# Altium PCB LCboardPCB.PcbDoc (part 2 of 2)
Units mil, origin at the board's own origin, x right, y up, seen from the top; angles counter-clockwise.
Board outline 1635 x 3515 mil, 6 copper layers (Top Layer, Mid-Layer 1, Internal Plane 1, Internal Plane 2, Mid-Layer 2, Bottom Layer); 117 components, 210 nets, 605 pads, 96 vias.
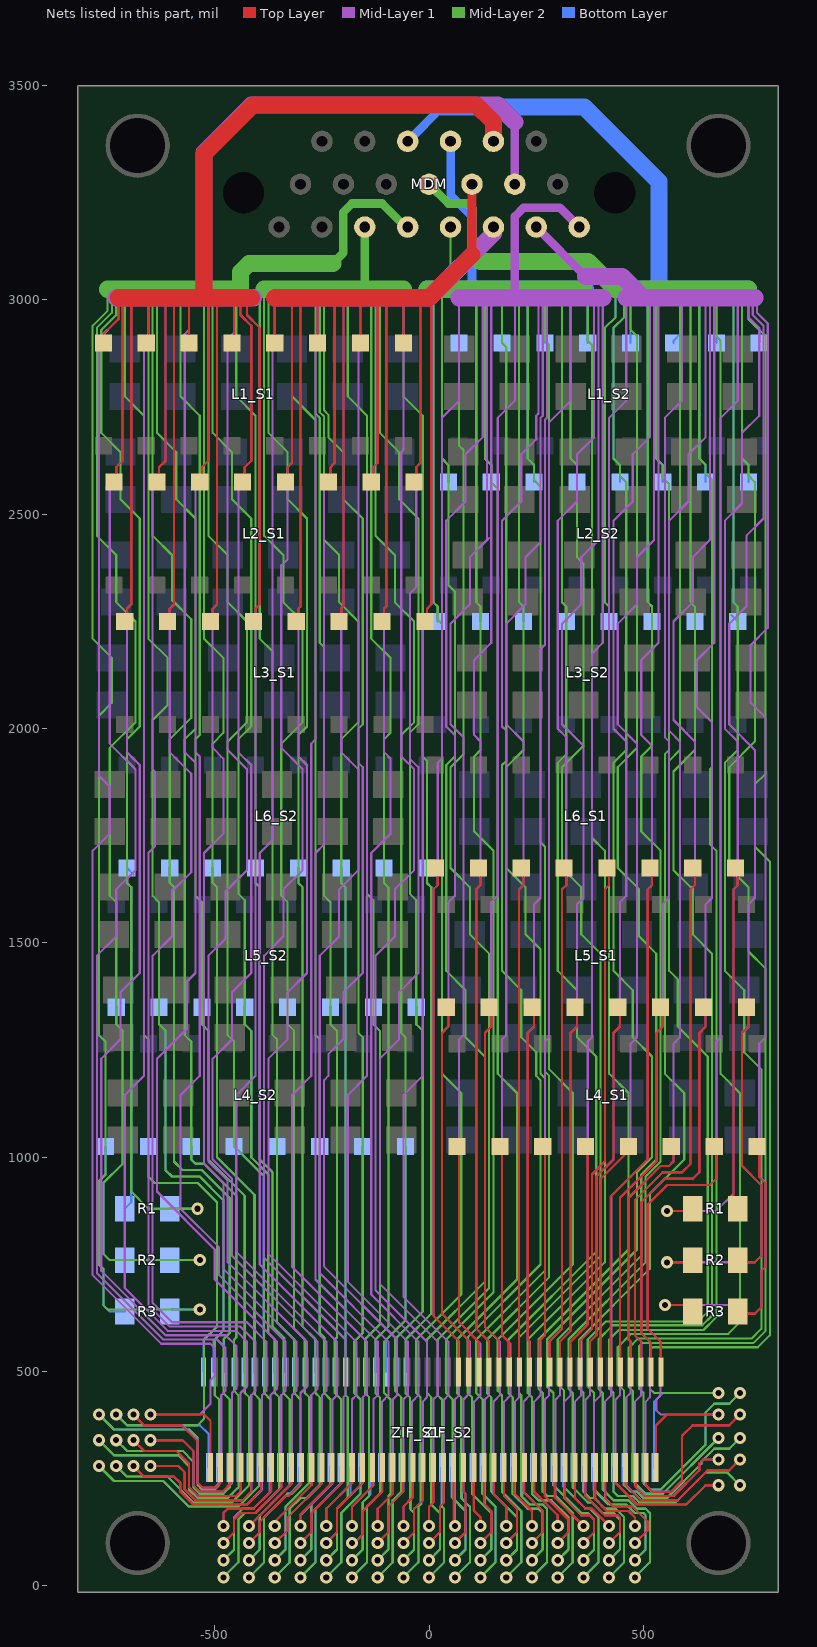
[diagram p6: the nets of this part, all layers, seen from the top]

## Via types
v1: diameter 28.35, hole 14.17, Top Layer to Bottom Layer, 96 vias

## Nets (pads, with @x,y where several pads share a name; then routed paths per layer and width w, separated by ;. In a path a pad name is that pad's centre, name@x,y a point inside that pad or via, vN(x,y) a via of type N, cw(c..) or ccw(c..) an arc to the next point about the centre after c; other vN are vias at no path point) (continued)
NetJ1_3: L1_S1.5 L1_S1.6 L1_S1.7 L1_S1.8 L2_S1.5 L2_S1.6 L2_S1.7 L2_S1.8 L3_S1.5 L3_S1.6 L3_S1.7 L3_S1.8 MDM.3 | length 6701.8
  Top Layer w5: L1_S1.8@-760,2900 -760,2920 -725,2955 -725,3005 -715,2995 -715,2625 -730,2610 L2_S1.8@-730,2570 ; L3_S1.8@-705,2245 -705,2280 -695,2290 -695,3005 ; L1_S1.7@-655,2895 -655,3005 ; L2_S1.7@-630,2570 -630,2610 -615,2625 -615,3005 ; L3_S1.7@-605,2245 -605,2280 -595,2290 -595,3000 ; L1_S1.6@-560,2900 -560,3005 ; L2_S1.6@-530,2570 -530,2610 -515,2625 -515,2995 ; L3_S1.6@-505,2245 -505,2280 -495,2290 -495,3005 ; L1_S1.5@-455,2895 -455,3005 ; -440,2990 -440,2965 -415,2940 -415,2625 -430,2610 L2_S1.5@-430,2570 ; -415,3005 -425,2995 -425,2965 -395,2935 -395,2290 -405,2280 L3_S1.5@-405,2245 ; -340,3450 -340,3455
  Top Layer w40: -725,3005 -695,3005 -655,3005 -615,3005 -560,3005 -525,3005 ; -415,3005 -455,3005 -495,3005 -525,3005 ; MDM.3@150,3370 150,3415 110,3455 -340,3455 -411,3455 -525,3341 -525,3005
NetJ1_4: L1_S1.1 L1_S1.2 L1_S1.3 L1_S1.4 L2_S1.1 L2_S1.2 L2_S1.3 L2_S1.4 L3_S1.1 L3_S1.2 L3_S1.3 L3_S1.4 MDM.4 | length 5895.4
  Top Layer w5: L1_S1.4@-360,2900 -360,3005 ; L2_S1.4@-330,2570 -330,2610 -320,2620 -320,3005 ; L3_S1.4@-305,2245 -305,2280 -300,2285 -300,3005 ; L1_S1.3@-260,2900 -260,3005 ; L2_S1.3@-230,2570 -230,2610 -220,2620 -220,3005 ; L3_S1.3@-205,2245 -205,2280 -200,2285 -200,3005 ; L1_S1.2@-160,2900 -160,3005 ; L2_S1.2@-130,2570 -130,2610 -120,2620 -120,3005 ; L3_S1.2@-105,2245 -105,2280 -100,2285 -100,3005 ; L1_S1.1@-60,2900 -60,3005 ; L2_S1.1@-30,2570 -30,2610 -20,2620 -20,3005 ; L3_S1.1@-5,2245 -5,2280 5,2290 5,3000 0,3005
  Top Layer w20: 100,3105 MDM.4@100,3270
  Top Layer w40: -360,3005 -320,3005 -300,3005 -260,3005 -220,3005 -200,3005 -160,3005 -120,3005 -100,3005 -60,3005 -20,3005 0,3005 100,3105
NetJ1_5: L1_S2.1 L1_S2.2 L1_S2.3 L1_S2.4 L2_S2.1 L2_S2.2 L2_S2.3 L2_S2.4 L3_S2.1 L3_S2.2 L3_S2.3 L3_S2.4 MDM.5 | length 6209.1
  Bottom Layer w5: -5,3025 10,3010 10,2295 20,2285 L3_S2.1@20,2250 ; 30,3025 30,2630 45,2615 L2_S2.1@45,2575 ; MDM.5@40,3370 MDM.5@50,3370 ; L1_S2.1@70,2900 70,3025 ; 100,3025 110,3015 110,2295 120,2285 L3_S2.2@120,2250 ; 130,3025 130,2630 145,2615 L2_S2.2@145,2575 ; L1_S2.2@170,2900 170,3025 ; L3_S2.3@220,2250 220,2285 210,2295 210,3025 230,3005 230,2630 245,2615 L2_S2.3@245,2575 ; L1_S2.3@270,2900 270,3025 ; L3_S2.4@320,2250 320,2285 310,2295 310,3025 330,3005 330,2630 345,2615 L2_S2.4@345,2575 ; L1_S2.4@370,2900 370,3020
  Bottom Layer w20: MDM.5@50,3370 50,3245 100,3195 100,3025
  Bottom Layer w40: -5,3025 30,3025 70,3025 100,3025 130,3025 170,3025 210,3025 270,3025 310,3025 365,3025
NetJ1_6: L1_S2.5 L1_S2.6 L1_S2.7 L1_S2.8 L2_S2.5 L2_S2.6 L2_S2.7 L2_S2.8 L3_S2.5 L3_S2.6 L3_S2.7 L3_S2.8 MDM.6 | length 6819.9
  Bottom Layer w5: L3_S2.5@420,2250 420,2285 410,2295 410,2935 435,2960 435,3025 ; L2_S2.5@445,2575 445,2615 430,2630 430,2935 455,2960 455,3020 460,3025 470,3015 L1_S2.5@470,2900 ; L3_S2.6@520,2250 520,2285 510,2295 510,3025 530,3005 530,2630 545,2615 L2_S2.6@545,2575 ; 535,3060 585,3010 585,2920 570,2905 L1_S2.6@570,2900 ; L3_S2.7@620,2250 620,2285 610,2295 610,3025 630,3005 630,2630 645,2615 L2_S2.7@645,2575 ; L1_S2.7@670,2900 670,3025 ; L3_S2.8@705,2265 L3_S2.8@720,2250 720,2285 710,2295 710,3025 730,3005 730,2630 745,2615 L2_S2.8@745,2575 ; 745,3025 745,2955 770,2930 L1_S2.8@770,2900
  Bottom Layer w20: MDM.6@-50,3370 30,3450
  Bottom Layer w40: 30,3450 362,3450 536,3276 536,3044 ; 435,3025 460,3025 510,3025 610,3025 670,3025 710,3025 745,3025
NetJ1_12: MDM.12 ZIF_S1.49 ZIF_S1.51 ZIF_S1.53 ZIF_S1.55 ZIF_S1.57 ZIF_S1.59 ZIF_S1.61 ZIF_S1.63 ZIF_S1.65 ZIF_S1.67 ZIF_S1.69 ZIF_S1.71 | length 38400.9
  Top Layer w5: ZIF_S1.49@56.93,276.54 56.93,143.07 v1(60,140) ; v1(60,100) 85,125 85,215 80.55,219.45 ZIF_S1.51@80.55,276.54 ; ZIF_S1.53@104.17,276.54 104.17,175.83 120,160 v1(120,140) ; v1(120,100) 145,125 145,175 127.8,192.2 ZIF_S1.55@127.8,276.54 ; ZIF_S1.57@151.42,276.54 151.42,213.58 180,185 v1(180,140) ; ZIF_S1.59@175.04,276.54 175.04,209.96 205,180 205,125 v1(180,100) ; ZIF_S1.61@198.66,276.54 198.66,216.34 240,175 v1(240,140) ; ZIF_S1.63@222.28,276.54 222.28,217.72 265,175 265,125 v1(240,100) ; ZIF_S1.65@245.91,276.54 245.91,219.09 300,165 v1(300,140) ; ZIF_S1.67@269.53,276.54 269.53,210.47 325,155 325,125 v1(300,100) ; ZIF_S1.69@293.15,276.54 293.15,206.85 v1(360,140) ; ZIF_S1.71@316.77,276.54 316.77,203.23 355,165 375,165 385,155 385,125 v1(360,100)
  Mid-Layer 1 w5: v1(60,100) 85,125 85,215 80,220 80,435 95,450 95,570 30,635 30,1290 45,1305 45,1595 60,1610 60,1985 40,2005 40,2485 85,2530 85,2640 125,2680 125,3005 135,2995 135,2440 ; v1(60,140) 60,435 70,445 70,570 10,630 10,1625 20,1635 20,1920 30,1930 30,2725 70,2765 70,3005 ; v1(120,100) 145,125 145,175 130,190 130,435 140,445 140,570 110,600 110,1625 120,1635 120,1970 105,1985 105,2160 145,2200 145,3005 ; v1(120,140) 120,160 105,175 105,430 120,445 120,565 70,615 70,1275 80,1285 80,1980 50,2010 50,2245 95,2290 95,2400 135,2440 ; 140,2445 135,2440 ; v1(180,100) 205,125 205,180 175,210 175,430 190,445 190,565 170,585 170,1275 180,1285 180,1995 170,2005 170,2485 215,2530 215,2640 250,2675 250,2730 255,2735 255,3005 265,2995 265,2730 260,2725 260,2435 225,2400 225,2290 180,2245 180,2010 220,1970 220,1635 210,1625 210,440 200,430 200,215 240,175 v1(240,140) ; v1(180,140) 180,185 150,215 150,430 165,445 165,570 130,605 130,1290 145,1305 145,1595 160,1610 160,2725 200,2765 200,3005 ; v1(240,100) 265,125 265,175 220,220 220,430 235,445 235,570 230,575 230,1290 245,1305 245,1590 260,1605 260,2185 270,2195 270,2720 275,2725 275,3005 ; v1(300,100) 325,125 325,155 270,210 270,435 280,445 280,570 310,600 310,1625 320,1635 320,1980 300,2000 300,2485 345,2530 345,2640 385,2680 385,3005 ; v1(300,140) 300,165 245,220 245,430 260,445 260,575 270,585 270,1270 280,1280 280,2715 330,2765 330,3005 ; MDM.12@345,3170 MDM.12@350,3170 ; v1(360,100) 385,125 385,155 375,165 355,165 315,205 315,430 330,445 330,570 370,610 370,1270 380,1280 380,2175 405,2200 405,3005 ; v1(360,140) 295,205 295,435 305,445 305,570 330,595 330,1290 345,1305 345,1590 360,1605 360,1960 310,2010 310,2245 355,2290 355,2400 395,2440 395,3005
  Mid-Layer 1 w20: 200,3005 200,3195 220,3215 305,3215 MDM.12@350,3170
  Mid-Layer 1 w40: 70,3005 125,3005 145,3005 200,3005 255,3005 275,3005 330,3005 385,3005 395,3005 405,3005
NetJ1_13: MDM.13 R1.1@615,880 R2.1@615,760 R3.1@615,640 ZIF_S1.73 ZIF_S1.75 ZIF_S1.77 ZIF_S1.79 ZIF_S1.81 ZIF_S1.83 ZIF_S1.85 ZIF_S1.87 ZIF_S1.89 | length 38575.8
  Top Layer w5: ZIF_S1.73@340.39,276.54 340.39,204.61 365,180 380,180 v1(420,140) ; ZIF_S1.75@364.02,271.54 364.02,210.98 410,165 440,165 445,160 445,125 v1(420,100) ; ZIF_S1.77@387.64,271.54 387.64,202.36 415,175 465,175 480,160 v1(480,140) ; ZIF_S1.79@411.26,271.54 411.26,203.74 430,185 475,185 510,150 510,130 v1(480,100) ; ZIF_S1.81@434.88,276.54 434.88,240.12 485,190 600,190 645,235 v1(675,235) ; ZIF_S1.83@458.5,276.54 458.5,235.27 493.77,200 580,200 650,270 700,270 v1(725,295) ; ZIF_S1.85@482.13,271.54 482.13,230 502.13,210 570,210 630,270 630,285 640,295 v1(675,295) ; ZIF_S1.87@505.75,276.54 505.75,235 521.5,219.25 564.25,219.25 590,245 590,350 615,375 700,375 v1(725,400) ; ZIF_S1.89@529.37,276.54 529.37,374.37 555,400 v1(675,400) ; v1(550,655) R3.1@600,655 ; v1(555,755) R2.1@620,755 ; v1(555,875) R1.1@620,875
  Mid-Layer 1 w5: v1(420,100) 445,125 445,160 440,165 410,165 365,210 365,435 375,445 375,570 390,585 390,955 430,995 430,1290 445,1305 445,1595 460,1610 460,1970 430,2000 430,2485 475,2530 475,2640 515,2680 515,3005 525,2995 525,2440 485,2400 485,2290 440,2245 440,2010 485,1965 485,1280 470,1265 470,1020 400,950 400,445 385,430 385,205 415,175 465,175 480,160 v1(480,140) ; v1(420,140) 380,180 365,180 340,205 340,430 355,445 355,575 380,600 380,960 410,990 410,1625 420,1635 420,2725 460,2765 460,3005 ; v1(480,100) 510,130 510,150 475,185 430,185 410,205 410,430 425,445 425,910 510,995 510,1625 520,1635 520,1960 495,1985 495,2160 535,2200 535,3005 ; v1(550,655) 700,655 720,635 760,635 775,650 775,735 785,745 785,940 770,955 770,1265 785,1280 785,2025 750,2060 750,2195 790,2235 790,2945 765,2970 765,3000 ; v1(555,755) 760,755 775,770 775,935 730,980 730,1290 745,1305 745,1590 760,1605 760,1950 700,2010 700,2245 740,2285 740,2450 780,2490 780,2940 755,2965 755,3000 ; v1(555,875) 670,875 710,915 710,1625 720,1635 720,1970 690,2000 690,2485 730,2525 730,2690 770,2730 770,2935 745,2960 745,2990 ; 590,3005 590,2765 550,2725 550,1980 560,1970 560,1605 545,1590 545,1305 530,1290 530,990 445,905 445,445 435,435 435,240 485,190 600,190 645,235 v1(675,235) ; 665,3005 665,2200 625,2160 625,2050 660,2015 660,1605 645,1590 645,1305 630,1290 630,965 615,950 550,950 495,895 495,590 515,570 515,440 505,430 505,235 520,220 565,220 590,245 590,350 615,375 700,375 v1(725,400) ; v1(675,295) 640,295 630,285 630,270 570,210 505,210 480,235 480,430 495,445 495,570 480,585 480,900 545,965 590,965 610,985 610,1625 620,1635 620,1970 570,2020 570,2250 615,2295 615,2400 655,2440 655,2995 645,3005 645,2680 605,2640 605,2530 560,2485 560,1995 585,1970 585,1280 570,1265 570,990 560,980 540,980 465,905 465,575 470,570 470,450 460,440 460,235 495,200 580,200 650,270 700,270 v1(725,295) ; v1(675,400) 540,400 530,410 530,435 540,445 540,570 510,600 510,890 555,935 655,935 670,950 670,1270 680,1280 680,2725 720,2765 720,3005
  Mid-Layer 1 w20: MDM.13@250,3170 365,3055
  Mid-Layer 1 w40: 365,3055 450,3055 500,3005 ; 460,3005 500,3005 ; 760,3005 720,3005 665,3005 645,3005 590,3005 535,3005 515,3005 500,3005
NetJ1_14: MDM.14 ZIF_S1.1 ZIF_S1.3 ZIF_S1.5 ZIF_S1.7 ZIF_S1.9 ZIF_S1.11 ZIF_S1.13 ZIF_S1.15 ZIF_S1.17 ZIF_S1.19 ZIF_S1.21 ZIF_S1.23 | length 43240.2
  Top Layer w5: v1@-690,275 v1(-690,280) -665,255 -595,255 -580,240 -580,220 -550,190 -425,190 -391.89,223.11 ZIF_S1.11@-391.89,271.54 ; v1(-690,340) -665,315 -590,315 -560,285 -560,230 -540,210 -450,210 -439.13,220.87 ZIF_S1.7@-439.13,276.54 ; v1(-690,400) -665,375 -577.5,375 -540,337.5 -540,240 -530,230 -496.38,230 -486.38,240 ZIF_S1.3@-486.38,276.54 ; v1(-650,280) -585,280 -570,265 -570,225 -545,200 -435,200 -415.51,219.49 ZIF_S1.9@-415.51,276.54 ; v1(-650,340) -575,340 -550,315 -550,235 -535,220 -482.76,220 -462.76,240 ZIF_S1.5@-462.76,276.54 ; v1(-650,400) -525,400 -510,385 ZIF_S1.1@-510,276.54 ; v1@-480,90 v1(-480,100) -455,125 -455,155 -440,170 -405,170 -344.65,230.35 ZIF_S1.15@-344.65,276.54 ; v1@-480,145 -480,170 -470,180 -410,180 -368.27,221.73 ZIF_S1.13@-368.27,271.54 ; v1(-420,100) -395,125 -395,150 -335,210 -327.4,210 -297.4,240 ZIF_S1.19@-297.4,276.54 ; v1(-420,140) -321.02,238.98 ZIF_S1.17@-321.02,271.54 ; v1(-360,100) -330,130 -330,160 -250.16,239.84 ZIF_S1.23@-250.16,276.54 ; v1(-360,140) -360,150 -273.78,236.22 ZIF_S1.21@-273.78,276.54
  Mid-Layer 1 w5: -730,3005 -725,3000 -725,2955 -770,2910 -770,1890 -745,1865 -745,1755 -785,1715 -785,725 -625,565 -510,565 -500,555 -500,490 -510,480 -510,425 -535,400 v1(-650,400) ; -715,2990 -715,2625 -730,2610 -730,2585 -745,2570 -745,1965 -685,1905 -685,1670 -730,1625 -730,1515 -775,1470 -775,730 -620,575 -495,575 -475,555 -475,455 -485,445 -485,245 -500,230 -530,230 -540,240 -540,340 -575,375 -665,375 v1(-690,400) ; -695,3000 -695,2290 -705,2280 -705,1945 -675,1915 -675,1430 -720,1385 -720,1275 -765,1230 -765,735 -615,585 -475,585 -450,560 -450,460 -460,450 -460,240 -480,220 -535,220 -550,235 -550,315 -575,340 v1(-650,340) ; v1(-690,280) -665,255 -595,255 -580,240 -580,220 -550,190 -425,190 -390,225 -390,445 -380,455 -380,570 -425,615 -600,615 -645,660 -645,1470 -600,1515 -600,1625 -595,1625 -555,1665 -555,1895 -605,1945 -605,2280 -595,2290 -595,2985 ; v1(-690,340) -665,315 -590,315 -560,285 -560,230 -540,210 -450,210 -440,220 -440,450 -425,465 -425,570 -450,595 -610,595 -710,695 -710,1145 -665,1190 -665,2900 -655,2910 -655,3005 ; v1(-650,280) -585,280 -570,265 -570,225 -545,200 -435,200 -415,220 -415,445 -405,455 -405,570 -440,605 -605,605 -655,655 -655,1710 -640,1725 -640,1900 -645,1905 -645,2575 -630,2590 -630,2610 -615,2625 -615,3005 ; -560,3005 -560,2930 -570,2920 -570,1945 -545,1920 -545,1430 -565,1410 -565,1300 -635,1230 -635,920 -500,785 -500,715 -355,570 -355,460 -370,445 -370,220 -410,180 -470,180 -480,170 v1(-480,140) ; -515,2995 -515,2625 -530,2610 -530,2580 -545,2565 -545,1945 -535,1935 -535,1190 -580,1145 -580,880 -490,790 -490,725 -335,570 -335,455 -345,445 -345,230 -405,170 -445,170 -455,160 -455,125 v1(-480,100) ; -495,3005 -495,2290 -505,2280 -505,1955 -480,1930 -480,1755 -525,1710 -525,985 -480,940 -480,740 -310,570 -310,455 -320,445 -320,240 v1(-420,140) ; -455,3005 -455,2925 -470,2910 -470,1950 -425,1905 -425,1670 -475,1620 -475,1510 -515,1470 -515,990 -470,945 -470,755 -285,570 -285,465 -300,450 -300,240 -330,210 -335,210 -395,150 -395,125 v1(-420,100) ; -440,2990 -440,2965 -415,2940 -415,2625 -430,2610 -430,2585 -445,2570 -445,1945 -415,1915 -415,1430 -460,1385 -460,1274.88 -505,1229.88 -505,995 -460,950 -460,770 -260,570 -260,460 -275,445 -275,235 -360,150 v1(-360,140) ; -425,2990 -425,2965 -395,2935 -395,2290 -405,2280 -405,1190 -450,1145 -450,780 -240,570 -240,455 -250,445 -250,240 -330,160 -330,130 v1(-360,100) ; -385,3450 -385,3455
  Mid-Layer 1 w20: MDM.14@200,3270 200,3415
  Mid-Layer 1 w40: -730,3005 -655,3005 -615,3005 -560,3005 -525,3005 ; -410,3005 -455,3005 -495,3005 -525,3005 ; 200,3415 160,3455 -385,3455 -414,3455 -525,3344 -525,3005
NetJ1_15: MDM.15 ZIF_S1.25 ZIF_S1.27 ZIF_S1.29 ZIF_S1.31 ZIF_S1.33 ZIF_S1.35 ZIF_S1.37 ZIF_S1.39 ZIF_S1.41 ZIF_S1.43 ZIF_S1.45 ZIF_S1.47 | length 38901.8
  Top Layer w5: v1(-300,100) -275,125 -275,170 -202.91,242.09 ZIF_S1.27@-202.91,276.54 ; v1(-300,140) -300,166.54 -226.54,240 ZIF_S1.25@-226.54,276.54 ; v1(-240,100) -215,125 -215,180 -155.67,239.33 ZIF_S1.31@-155.67,276.54 ; v1(-240,140) -240,180 -179.29,240.71 ZIF_S1.29@-179.29,276.54 ; v1(-180,100) -175,100 -155,120 -155,175 -108.43,221.57 ZIF_S1.35@-108.43,276.54 ; v1(-180,140) -180,185 -132.05,232.95 ZIF_S1.33@-132.05,276.54 ; v1(-120,100) -95,125 -95,185 -61.18,218.82 ZIF_S1.39@-61.18,276.54 ; v1(-120,140) -120,180 -84.8,215.2 ZIF_S1.37@-84.8,276.54 ; v1(-60,100) -35,125 -35,180 -13.94,201.06 ZIF_S1.43@-13.94,276.54 ; v1@-60,135 v1(-60,140) -60,185 -37.56,207.44 ZIF_S1.41@-37.56,276.54 ; v1(0,100) 25,125 25,185 33.31,193.31 ZIF_S1.47@33.31,276.54 ; v1@0,145 0,185 9.68,194.68 ZIF_S1.45@9.68,276.54
  Mid-Layer 1 w5: -360,3005 -360,2895 -365,2890 -365,1740 -395,1710 -395,750 -215,570 -215,445 -225,435 -225,240 -300,165 v1(-300,140) ; -320,3005 -320,2620 -330,2610 -330,2395 -345,2380 -345,1955 -295,1905 -295,1670 -340,1625 -340,1515 -385,1470 -385,765 -195,575 -195,445 -200,440 -200,245 -275,170 -275,125 v1(-300,100) ; -300,3005 -300,2285 -305,2280 -305,1935 -285,1915 -285,1430 -330,1385 -330,1275 -375,1230 -375,775 -170,570 -170,445 -180,435 -180,240 -240,180 v1(-240,140) ; -260,3005 -260,2895 -265,2890 -265,1975 -275,1965 -275,1190 -320,1145 -320,745 -145,570 -145,450 -155,440 -155,240 -215,180 -215,125 v1(-240,100) ; -220,3005 -220,2620 -230,2610 -230,2575 -245,2560 -245,1730 -265,1710 -265,715 -120,570 -120,445 -130,435 -130,235 -180,185 v1(-180,140) ; -200,3005 -200,2285 -205,2280 -205,1945 -165,1905 -165,1670 -210,1625 -210,1515 -255,1470 -255,730 -95,570 -95,445 -110,430 -110,220 -155,175 -155,120 -175,100 v1(-180,100) ; -160,3005 -160,2890 -165,2885 -165,1920 -155,1910 -155,1430 -200,1385 -200,1275 -235,1240 -235,1190 -245,1180 -245,745 -75,575 -75,445 -85,435 -85,215 -120,180 v1(-120,140) ; v1(-120,100) -95,125 -95,185 -60,220 -60,435 -50,445 -50,570 -190,710 -190,1145 -145,1190 -145,2555 -130,2570 -130,2610 -120,2620 -120,3005 ; -100,3005 -100,2285 -105,2280 -105,1945 -90,1930 -90,1755 -135,1710 -135,680 -25,570 -25,445 -40,430 -40,205 -60,185 v1(-60,140) ; v1(-60,100) -35,125 -35,180 -15,200 -15,430 -5,440 -5,570 -125,690 -125,1470 -80,1515 -80,1625 -35,1670 -35,1905 -65,1935 -65,2645 -60,2650 -60,3005 ; -20,3005 -20,2620 -30,2610 -30,2330 -45,2315 -45,1930 -25,1910 -25,1430 -70,1385 -70,1275 -115,1230 -115,705 20,570 20,445 10,435 10,195 0,185 v1(0,140) ; v1(0,100) 25,125 25,185 35,195 35,435 45,445 45,570 -60,675 -60,1145 -15,1190 -15,2240 -5,2250 -5,2280 5,2290 5,3000 0,3005 ; MDM.15@150,3155 MDM.15@150,3170
  Mid-Layer 1 w40: -360,3005 -320,3005 -300,3005 -260,3005 -220,3005 -200,3005 -160,3005 -120,3005 -100,3005 -60,3005 -20,3005 0,3005 MDM.15@150,3155
NetJ1_16: MDM.16 ZIF_S2.25 ZIF_S2.27 ZIF_S2.29 ZIF_S2.31 ZIF_S2.33 ZIF_S2.35 ZIF_S2.37 ZIF_S2.39 ZIF_S2.41 ZIF_S2.43 ZIF_S2.45 ZIF_S2.47 | length 41293.1
  Mid-Layer 2 w5: v1(-60,20) -25,55 -25,185 -20,190 -20,440 -30,450 -30,575 75,680 75,1150 30,1195 30,2245 20,2255 20,2285 10,2295 10,3010 -5,3025 ; v1(0,20) 35,55 35,180 30,185 30,435 20,445 20,575 140,695 140,1475 95,1520 95,1630 50,1675 50,1910 80,1940 80,2650 70,2660 70,3025 ; v1(0,60) 25,85 25,170 5,190 5,440 -5,450 -5,575 130,710 130,1235 85,1280 85,1390 40,1435 40,1915 60,1935 60,2320 45,2335 45,2615 30,2630 30,3025 ; 50,3025 MDM.16@50,3170 ; v1(60,20) 95,55 95,185 75,205 75,440 65,450 65,575 205,715 205,1150 160,1195 160,2560 145,2575 145,2615 130,2630 130,3025 110,3005 110,2295 120,2285 120,1950 105,1935 105,1760 150,1715 150,685 40,575 40,450 55,435 55,205 85,175 85,85 v1(60,60) ; v1(120,20) 155,55 155,185 125,215 125,435 110,450 110,575 270,735 270,1185 260,1195 260,1485 225,1520 225,1630 180,1675 180,1910 220,1950 220,2285 210,2295 210,3005 230,3025 230,2630 245,2615 245,2580 260,2565 260,1735 270,1725 270,1200 280,1190 280,720 135,575 135,450 145,440 145,220 205,160 205,85 v1(180,60) ; v1(120,60) 145,85 145,170 100,215 100,440 90,450 90,580 260,750 260,1180 250,1190 250,1245 215,1280 215,1390 170,1435 170,1915 180,1925 180,2890 170,2900 170,3025 ; v1(180,20) 215,55 215,175 170,220 170,445 160,455 160,575 335,750 335,1150 280,1205 280,2895 270,2905 270,3025 ; v1(240,20) 275,55 275,180 265,190 235,190 215,210 215,445 210,450 210,580 400,770 400,1475 355,1520 355,1630 310,1675 310,1910 360,1960 360,2385 345,2400 345,2615 330,2630 330,3020 325,3025 310,3010 310,2295 320,2285 320,1940 300,1920 300,1435 345,1390 345,1280 390,1235 390,780 185,575 185,450 195,440 195,215 230,180 255,180 265,170 265,85 v1(240,60) ; v1(300,60) 325,85 325,160 285,200 255,200 240,215 240,440 230,450 230,575 410,755 410,1715 380,1745 380,2895 370,2905 370,3015 360,3025
  Mid-Layer 2 w40: -5,3025 30,3025 50,3025 70,3025 130,3025 170,3025 230,3025 270,3025 325,3025 360,3025
  Bottom Layer w5: v1(-60,20) -25,55 -25,185 -18.31,191.69 ZIF_S2.47@-18.31,276.54 ; v1(0,20) 35,55 35,180 28.94,186.06 ZIF_S2.43@28.94,276.54 ; v1(0,60) 25,85 25,170 5.32,189.68 ZIF_S2.45@5.32,276.54 ; ZIF_S2.41@52.56,276.54 52.56,207.44 85,175 85,85 v1(60,60) ; v1(60,20) 95,55 95,185 76.18,203.82 ZIF_S2.39@76.18,276.54 ; ZIF_S2.37@99.8,276.54 99.8,215.2 145,170 145,85 v1(120,60) ; v1(120,20) 155,55 155,185 123.43,216.57 ZIF_S2.35@123.43,276.54 ; ZIF_S2.33@147.05,276.54 147.05,217.95 205,160 205,85 v1(180,60) ; ZIF_S2.31@170.67,276.54 170.67,219.33 215,175 215,55 v1(180,20) ; ZIF_S2.29@194.29,276.54 194.29,215.71 230,180 255,180 265,170 265,85 v1(240,60) ; ZIF_S2.27@217.91,276.54 217.91,207.09 235,190 265,190 275,180 275,55 v1(240,20) ; ZIF_S2.25@241.54,276.54 241.54,213.46 255,200 285,200 325,160 325,85 v1(300,60)
NetJ1_17: MDM.17 ZIF_S2.1 ZIF_S2.3 ZIF_S2.5 ZIF_S2.7 ZIF_S2.9 ZIF_S2.11 ZIF_S2.13 ZIF_S2.15 ZIF_S2.17 ZIF_S2.19 ZIF_S2.21 ZIF_S2.23 | length 44366.4
  Mid-Layer 2 w5: v1(300,20) 335,55 335,170 295,210 275,210 265,220 265,450 255,460 255,575 465,785 465,1150 420,1195 420,2285 410,2295 410,2935 435,2960 435,3025 ; v1(360,20) 395,55 395,160 375,180 365,180 315,230 315,455 300,470 300,575 495,770 495,960 530,995 530,1475 490,1515 490,1625 440,1675 440,1910 485,1955 485,2915 470,2930 470,3025 455,3010 455,2960 430,2935 430,2630 445,2615 445,2590 460,2575 460,1950 430,1920 430,1435 475,1390 475,1280 520,1235 520,1000 485,965 485,785 275,575 275,465 290,450 290,235 355,170 370,170 385,155 385,85 v1(360,60) ; v1(420,20) 455,55 455,160 435,180 410,180 385,205 375,205 360,220 360,450 350,460 350,575 515,740 515,915 595,995 595,1150 550,1195 550,1940 560,1950 560,2570 545,2585 545,2615 530,2630 530,3025 ; v1(420,60) 445,85 445,155 430,170 405,170 380,195 370,195 335,230 335,450 325,460 325,575 505,755 505,955 540,990 540,1715 495,1760 495,1935 520,1960 520,2285 510,2295 510,3025 ; v1(480,20) 515,55 515,170 505,180 485,180 465,200 430,200 405,225 405,450 395,460 395,575 428,608 637,608 660,631 660,1475 615,1520 615,1630 610,1630 570,1670 570,1900 620,1950 620,2285 610,2295 610,3025 ; v1(480,60) 505,85 505,165 500,170 480,170 460,190 420,190 385,225 385,450 370,465 370,575 412,617 627,617 650,640 650,1235 580,1305 580,1415 560,1435 560,1925 585,1950 585,3025 ; 630,3025 630,2630 645,2615 645,2595 660,2580 660,1910 655,1905 655,1730 670,1715 670,627 640,597 442,597 420,575 420,460 430,450 430,220 440,210 475,210 490,195 575,195 645,265 695,265 v1(725,235) ; 670,3025 670,2915 680,2905 680,1195 725,1150 725,615 698,588 471,588 440,557 440,470 455,455 455,235 470,220 485,220 500,205 555,205 635,285 635,290 665,320 700,320 v1(725,345) ; v1(675,345) 545,215 505,215 475,245 475,455 465,465 465,555 487,577 752,577 775,600 775,1205 735,1245 735,1390 690,1435 690,1920 720,1950 720,2285 710,2295 710,3025 ; v1(675,450) 525,450 515,460 515,550 522,557 767,557 795,585 795,1690 760,1725 760,1870 785,1895 785,2915 745,2955 745,3010 ; v1(725,450) 700,425 665,425 645,405 645,330 540,225 515,225 500,240 500,450 490,460 490,560 497,567 757,567 785,595 785,1440 745,1480 745,1630 700,1675 700,1910 760,1970 760,2575 745,2590 745,2615 730,2630 730,3025
  Mid-Layer 2 w20: MDM.17@0,3270 45,3225 90,3225 100,3215 100,3110 120,3090
  Mid-Layer 2 w40: 120,3090 370,3090 435,3025 470,3025 510,3025 530,3025 585,3025 610,3025 630,3025 670,3025 710,3025 730,3025 745,3025
  Bottom Layer w5: ZIF_S2.23@265.16,276.54 265.16,219.84 275,210 295,210 335,170 335,55 v1(300,20) ; ZIF_S2.21@288.78,276.54 288.78,236.22 355,170 370,170 385,155 385,85 v1(360,60) ; ZIF_S2.19@312.4,276.54 312.4,232.6 365,180 375,180 395,160 395,55 v1(360,20) ; ZIF_S2.17@336.02,276.54 336.02,228.98 370,195 380,195 405,170 430,170 445,155 445,85 v1(420,60) ; ZIF_S2.15@359.65,276.54 359.65,220.35 375,205 385,205 410,180 435,180 455,160 455,55 v1(420,20) ; ZIF_S2.13@383.27,276.54 383.27,225 418.27,190 460,190 480,170 500,170 505,165 505,85 v1(480,60) ; ZIF_S2.11@406.89,276.54 406.89,223.11 430,200 465,200 485,180 505,180 515,170 515,55 v1(480,20) ; ZIF_S2.9@430.51,276.54 430.51,219.49 440,210 475,210 490,195 575,195 645,265 695,265 v1(725,235) ; ZIF_S2.7@454.13,276.54 454.13,235.87 470,220 485,220 500,205 555,205 635,285 635,290 665,320 700,320 v1(725,345) ; ZIF_S2.5@477.76,276.54 477.76,242.24 505,215 545,215 v1(675,345) ; ZIF_S2.3@501.38,276.54 501.38,238.62 515,225 540,225 645,330 645,405 665,425 700,425 v1(725,450) ; ZIF_S2.1@525,276.54 525,430 545,450 v1(675,450)
NetJ1_18: MDM.18 R1.1@-605,880 R2.1@-605,760 R3.1@-605,640 ZIF_S2.73 ZIF_S2.75 ZIF_S2.77 ZIF_S2.79 ZIF_S2.81 ZIF_S2.83 ZIF_S2.85 ZIF_S2.87 ZIF_S2.89 | length 40938.1
  Mid-Layer 2 w5: v1(-770,280) -735,245 -620,245 -560,185 -445,185 -395,235 -395,435 -406.81,446.81 -406.81,911.81 -495,1000 -495,1630 -505,1640 -505,1965 -480,1990 -480,2165 -525,2210 -525,3015 -515,3025 ; v1(-770,340) -735,305 -585,305 -560,280 -560,225 -540,205 -470,205 -445,230 -445,445 -455,455 -455,575 -450,580 -450,910 -525,985 -545,985 -555,995 -555,1270 -570,1285 -570,1975 -545,2000 -545,2490 -590,2535 -590,2645 -635,2690 -635,3015 -645,3025 ; v1(-770,400) -735,365 -560,365 -540,345 -540,235 -530,225 -500,225 -490,235 -490,435 -500,445 -500,575 -480,595 -480,900 -535,955 -600,955 -615,970 -615,1295 -630,1310 -630,1595 -645,1610 -645,2020 -610,2055 -610,2165 -655,2210 -655,3015 -645,3025 ; -750,3025 -750,2975 -785,2940 -785,2210 -740,2165 -740,2060 -770,2030 -770,1285 -755,1270 -755,960 -770,945 -770,750 -760,740 -760,655 -750,645 v1(-535,645) ; -740,3015 -740,2970 -775,2935 -775,2450 -730,2405 -730,2295 -685,2250 -685,2015 -745,1955 -745,1610 -730,1595 -730,1310 -715,1295 -715,985 -760,940 -760,775 -745,760 v1(-535,760) ; v1(-730,280) -705,255 -610,255 -550,195 -460,195 -420,235 -420,440 -430,450 -430,910 -515,995 -515,1295 -530,1310 -530,1595 -545,1610 -545,1975 -535,1985 -535,2730 -580,2775 -580,3005 ; v1(-730,340) -705,315 -575,315 -550,290 -550,230 -535,215 -480,215 -465,230 -465,435 -480,450 -480,575 -465,590 -465,905 -530,970 -575,970 -595,990 -595,1630 -605,1640 -605,1975 -555,2025 -555,2255 -600,2300 -600,2405 -645,2450 -645,3025 ; v1(-730,400) -705,375 -540,375 -525,390 -525,575 -495,605 -495,895 -540,940 -640,940 -655,955 -655,1275 -665,1285 -665,2730 -710,2775 -710,3025 ; -730,3025 -730,2965 -765,2930 -765,2690 -720,2645 -720,2535 -675,2490 -675,2005 -705,1975 -705,1640 -695,1630 -695,920 -655,880 v1(-540,880) ; v1(-480,20) -445,55 -445,155 -430,170 -405,170 -350,225 -350,440 -360,450 -360,575 -375,590 -375,960 -415,1000 -415,1295 -430,1310 -430,1600 -445,1615 -445,1975 -415,2005 -415,2490 -460,2535 -460,2645 -505,2690 -505,3015 -515,3025 ; v1(-480,60) -455,85 -455,160 -435,180 -410,180 -370,220 -370,435 -385,450 -385,955 -455,1025 -455,1270 -470,1285 -470,1970 -425,2015 -425,2250 -470,2295 -470,2405 -515,2450 -515,3025 ; -440,3025 -450,3015 -450,2775 -405,2730 -405,1640 -395,1630 -395,995 -365,965 -365,605 -340,580 -340,450 -325,435 -325,235 -395,165 -395,85 v1(-420,60) ; MDM.18@-55,3170 MDM.18@-50,3170
  Mid-Layer 2 w20: -225,3085 -200,3110 -200,3205 -180,3225 -110,3225 MDM.18@-55,3170
  Mid-Layer 2 w40: -750,3025 -730,3025 -710,3025 -645,3025 -515,3025 -440,3025 -440,3065 -420,3085 -225,3085
  Bottom Layer w5: v1(-770,280) -735,245 -620,245 -560,185 -445,185 -396.26,233.74 ZIF_S2.79@-396.26,276.54 ; v1(-770,340) -735,305 -585,305 -560,280 -560,225 -540,205 -470,205 -443.5,231.5 ZIF_S2.83@-443.5,276.54 ; v1(-770,400) -735,365 -560,365 -540,345 -540,237.5 -527.5,225 -500,225 -490.75,234.25 ZIF_S2.87@-490.75,276.54 ; v1(-730,280) -705,255 -610,255 -550,195 -459.76,195 -419.88,234.88 ZIF_S2.81@-419.88,276.54 ; v1(-730,340) -705,315 -575,315 -550,290 -550,230 -535,215 -480,215 -467.13,227.87 ZIF_S2.85@-467.13,276.54 ; v1(-730,400) -705,375 -535,375 -514.37,354.37 ZIF_S2.89@-514.37,276.54 ; R2.1@-605,760 v1@-540,760 ; R1.1@-605,880 v1(-540,880) ; R3.1@-600,645 v1(-535,645) ; v1(-480,20) -445,55 -445,155 -430,170 -405,170 -349.02,225.98 ZIF_S2.75@-349.02,276.54 ; v1(-480,60) -455,85 -455,160 -435,180 -410,180 -372.64,217.36 ZIF_S2.77@-372.64,276.54 ; v1(-420,60) -395,85 -395,165 -325.39,234.61 ZIF_S2.73@-325.39,276.54
NetJ1_19: MDM.19 ZIF_S2.49 ZIF_S2.51 ZIF_S2.53 ZIF_S2.55 ZIF_S2.57 ZIF_S2.59 ZIF_S2.61 ZIF_S2.63 ZIF_S2.65 ZIF_S2.67 ZIF_S2.69 ZIF_S2.71 | length 40564.9
  Mid-Layer 2 w5: v1(-420,20) -385,55 -385,160 -330,215 -320,215 -300,235 -300,435 -315,450 -315,575 -355,615 -355,1275 -365,1285 -365,2180 -395,2210 -395,3015 -385,3025 ; v1(-360,20) -325,55 -325,180 -300,205 -285,205 -255,235 -255,440 -265,450 -265,575 -295,605 -295,1630 -305,1640 -305,1985 -285,2005 -285,2490 -330,2535 -330,2645 -375,2690 -375,3015 -385,3025 ; v1(-360,60) -335,85 -335,185 -280,240 -280,440 -290,450 -290,575 -315,600 -315,1295 -330,1310 -330,1595 -345,1610 -345,1965 -295,2015 -295,2250 -340,2295 -340,2405 -385,2450 -385,3025 ; -320,3025 -320,2775 -265,2720 -265,1285 -255,1275 -255,590 -245,580 -245,450 -230,435 -230,235 -275,190 -275,85 v1(-300,60) ; v1(-300,20) -265,55 -265,180 -205,240 -205,435 -220,450 -220,575 -215,580 -215,1295 -230,1310 -230,1595 -245,1610 -245,2190 -255,2200 -255,2725 -257.5,2727.5 -262.5,2732.5 -265,2735 -265,3025 -255,3015 ; v1(-240,20) -205,55 -205,170 -160,215 -160,435 -175,450 -175,570 -155,590 -155,1280 -165,1290 -165,2000 -155,2010 -155,2490 -200,2535 -200,2645 -235,2680 -235,2732 -245,2742 -245,3005 -255,3015 ; v1(-240,60) -215,85 -215,180 -190,205 -190,440 -195,445 -195,1630 -205,1640 -205,1975 -165,2015 -165,2250 -210,2295 -210,2405 -245,2440 -245,2728 -255,2738 -255,3015 ; -190,3025 -190,2775 -145,2730 -145,1615 -130,1600 -130,1310 -115,1295 -115,610 -150,575 -150,450 -140,440 -140,210 -155,195 -155,85 v1(-180,60) ; v1(-180,20) -145,55 -145,185 -115,215 -115,440 -125,450 -125,575 -95,605 -95,1630 -105,1640 -105,1975 -90,1990 -90,2165 -135,2210 -135,3010 -150,3025 ; v1(-120,20) -85,55 -85,200 -65,220 -65,440 -80,455 -80,575 -15,640 -15,1295 -30,1310 -30,1600 -45,1615 -45,1990 -25,2010 -25,2490 -70,2535 -70,2645 -115,2690 -115,3020 -120,3025 -125,3020 -125,2450 -80,2405 -80,2295 -35,2250 -35,2015 -65,1985 -65,1290 -55,1280 -55,620 -105,570 -105,450 -90,435 -90,215 -95,210 -95,85 v1(-120,60) ; v1(-60,60) -35,85 -35,170 -45,180 -45,440 -55,450 -55,575 5,635 5,1630 -5,1640 -5,1925 -15,1935 -15,2730 -60,2775 -60,3025
  Mid-Layer 2 w20: -150,3025 MDM.19@-150,3170
  Mid-Layer 2 w40: -385,3025 -320,3025 -265,3025 -190,3025 -150,3025 -120,3025 -60,3025
  Bottom Layer w5: v1(-420,20) -385,55 -385,160.86 -330.86,215 -322.3,215 -301.77,235.52 ZIF_S2.71@-301.77,276.54 ZIF_S2.71@-298.33,273.09 ; v1(-360,20) -325,55 -325,180 -300,205 -285,205 -254.53,235.47 ZIF_S2.67@-254.53,276.54 ; v1(-360,60) -335,85 -335,185 -278.15,241.85 ZIF_S2.69@-278.15,276.54 ; v1(-300,20) -265,55 -265,180 -207.28,237.72 ZIF_S2.63@-207.28,276.54 ; v1(-300,60) -275,85 -275,190 -230.91,234.09 ZIF_S2.65@-230.91,276.54 ; v1(-240,20) -205,55 -205,170 -160.04,214.96 ZIF_S2.59@-160.04,276.54 ; v1(-240,60) -215,85 -215,180 -183.66,211.34 ZIF_S2.61@-183.66,276.54 ; v1(-180,20) -145,55 -145,185 -112.8,217.2 ZIF_S2.55@-112.8,276.54 ; v1(-180,60) -155,85 -155,195 -136.42,213.58 ZIF_S2.57@-136.42,276.54 ; v1(-120,20) -85,55 -85,200 -65.55,219.45 ZIF_S2.51@-65.55,276.54 ; v1(-120,60) -95,85 -95,210 -89.17,215.83 ZIF_S2.53@-89.17,276.54 ; v1(-60,60) -35,85 -35,170 -41.93,176.93 ZIF_S2.49@-41.93,276.54
NetJ2_S1_50: L6_S1.1 ZIF_S1.50 | length 1204.5
  Top Layer w5: L6_S1.1@20,1670 20,1635 10,1625 10,630 68.74,571.26 ZIF_S1.50@68.74,493.98
NetJ2_S1_52: L5_S1.1 ZIF_S1.52 | length 883.1
  Top Layer w5: L5_S1.1@45,1345 45,1305 30,1290 30,635 92.36,572.64 ZIF_S1.52@92.36,493.98
NetJ2_S1_54: L4_S1.1 ZIF_S1.54 | length 545.1
  Top Layer w5: L4_S1.1@70,1020 70,615 115.98,569.02 ZIF_S1.54@115.98,493.98
NetJ2_S1_56: L6_S1.2 ZIF_S1.56 | length 1192.4
  Top Layer w5: L6_S1.2@120,1670 120,1635 110,1625 110,600 139.61,570.39 ZIF_S1.56@139.61,493.98
NetJ2_S1_58: L5_S1.2 ZIF_S1.58 | length 871
  Top Layer w5: L5_S1.2@145,1345 145,1305 130,1290 130,605 163.23,571.77 ZIF_S1.58@163.23,493.98
NetJ2_S1_60: L4_S1.2 ZIF_S1.60 | length 533
  Top Layer w5: L4_S1.2@170,1020 170,585 186.85,568.15 ZIF_S1.60@186.85,493.98
NetJ2_S1_62: L6_S1.3 ZIF_S1.62 | length 1180.4
  Top Layer w5: ZIF_S1.62@210.47,493.98 210,494.45 210,1625 220,1635 L6_S1.3@220,1670
NetJ2_S1_64: L5_S1.3 ZIF_S1.64 | length 858.9
  Top Layer w5: ZIF_S1.64@234.09,493.98 234.09,570 230,574.09 230,1290 245,1305 L5_S1.3@245,1345
NetJ2_S1_66: L4_S1.3 ZIF_S1.66 | length 531.1
  Top Layer w5: ZIF_S1.66@257.72,493.98 257.72,572.72 270,585 L4_S1.3@270,1020
NetJ2_S1_68: L6_S1.4 ZIF_S1.68 | length 1192
  Top Layer w5: ZIF_S1.68@281.34,493.98 281.34,571.34 310,600 310,1625 320,1635 L6_S1.4@320,1670
NetJ2_S1_70: L5_S1.4 ZIF_S1.70 | length 867.6
  Top Layer w5: ZIF_S1.70@304.96,493.98 304.96,569.96 330,595 330,1290 345,1305 L5_S1.4@345,1345
NetJ2_S1_72: L4_S1.4 ZIF_S1.72 | length 543.2
  Top Layer w5: ZIF_S1.72@328.58,493.98 328.58,568.58 370,610 L4_S1.4@370,1020
NetJ2_S1_74: L6_S1.5 ZIF_S1.74 | length 1204.1
  Top Layer w5: ZIF_S1.74@352.2,493.98 352.2,572.2 380,600 380,960 410,990 410,1625 420,1635 L6_S1.5@420,1670
NetJ2_S1_76: L5_S1.5 ZIF_S1.76 | length 880.4
  Top Layer w5: ZIF_S1.76@375.83,493.98 375,494.8 375,570 390,585 390,955 430,995 430,1290 445,1305 L5_S1.5@445,1345
NetJ2_S1_78: L4_S1.5 ZIF_S1.78 | length 555.2
  Top Layer w5: ZIF_S1.78@399.45,493.98 400,494.53 400,950 L4_S1.5@470,1020
NetJ2_S1_80: L6_S1.6 ZIF_S1.80 | length 1216.2
  Top Layer w5: ZIF_S1.80@423.07,493.98 423.07,908.07 510,995 510,1625 520,1635 L6_S1.6@520,1670
NetJ2_S1_82: L5_S1.6 ZIF_S1.82 | length 893.1
  Top Layer w5: ZIF_S1.82@446.69,493.98 446.69,568.31 445,570 445,905 530,990 530,1290 545,1305 L5_S1.6@545,1345
NetJ2_S1_84: L4_S1.6 ZIF_S1.84 | length 583.4
  Top Layer w5: ZIF_S1.84@470.31,493.98 470.31,569.69 465,575 465,905 540,980 560,980 570,990 L4_S1.6@570,1020
NetJ2_S1_86: L6_S1.7 ZIF_S1.86 | length 1266.1
  Top Layer w5: ZIF_S1.86@493.94,493.98 493.94,571.06 480,585 480,900 545,965 590,965 610,985 610,1625 620,1635 L6_S1.7@620,1670
NetJ2_S1_88: L5_S1.7 ZIF_S1.88 | length 960.6
  Top Layer w5: ZIF_S1.88@517.56,493.98 517.56,567.44 495,590 495,895 550,950 615,950 630,965 630,1290 645,1305 L5_S1.7@645,1345
NetJ2_S1_90: L4_S1.7 ZIF_S1.90 | length 663.8
  Top Layer w5: ZIF_S1.90@541.18,493.98 541.18,568.82 510,600 510,890 555,935 655,935 670,950 L4_S1.7@670,1020
NetJ2_S2_50: L6_S2.1 ZIF_S2.50 | length 1204.5
  Bottom Layer w5: ZIF_S2.50@-53.74,498.98 -53.74,576.26 5,635 5,1630 -5,1640 L6_S2.1@-5,1675
NetJ2_S2_52: L5_S2.1 ZIF_S2.52 | length 883.1
  Bottom Layer w5: ZIF_S2.52@-77.36,498.98 -77.36,577.64 -15,640 -15,1295 -30,1310 L5_S2.1@-30,1350
NetJ2_S2_54: L4_S2.1 ZIF_S2.54 | length 545.1
  Bottom Layer w5: ZIF_S2.54@-100.98,498.98 -100.98,574.02 -55,620 L4_S2.1@-55,1025
NetJ2_S2_56: L6_S2.2 ZIF_S2.56 | length 1192.4
  Bottom Layer w5: ZIF_S2.56@-124.61,498.98 -124.61,575.39 -95,605 -95,1630 -105,1640 L6_S2.2@-105,1675
NetJ2_S2_58: L5_S2.2 ZIF_S2.58 | length 871
  Bottom Layer w5: ZIF_S2.58@-148.23,498.98 -148.23,576.77 -115,610 -115,1295 -130,1310 L5_S2.2@-130,1350
NetJ2_S2_60: L4_S2.2 ZIF_S2.60 | length 533
  Bottom Layer w5: ZIF_S2.60@-171.85,498.98 -171.85,573.15 -155,590 L4_S2.2@-155,1025
NetJ2_S2_62: L6_S2.3 ZIF_S2.62 | length 1180.4
  Bottom Layer w5: L6_S2.3@-205,1675 -205,1640 -195,1630 -195,499.45 ZIF_S2.62@-195.47,498.98
NetJ2_S2_64: L5_S2.3 ZIF_S2.64 | length 858.9
  Bottom Layer w5: L5_S2.3@-230,1350 -230,1310 -215,1295 -215,579.09 -219.09,575 ZIF_S2.64@-219.09,498.98
NetJ2_S2_66: L4_S2.3 ZIF_S2.66 | length 531.1
  Bottom Layer w5: L4_S2.3@-255,1025 -255,590 -242.72,577.72 ZIF_S2.66@-242.72,498.98
NetJ2_S2_68: L6_S2.4 ZIF_S2.68 | length 1192
  Bottom Layer w5: L6_S2.4@-305,1675 -305,1640 -295,1630 -295,605 -266.34,576.34 ZIF_S2.68@-266.34,498.98
NetJ2_S2_70: L5_S2.4 ZIF_S2.70 | length 867.6
  Bottom Layer w5: L5_S2.4@-330,1350 -330,1310 -315,1295 -315,600 -289.96,574.96 ZIF_S2.70@-289.96,498.98
NetJ2_S2_72: L4_S2.4 ZIF_S2.72 | length 543.2
  Bottom Layer w5: L4_S2.4@-355,1025 -355,615 -313.58,573.58 ZIF_S2.72@-313.58,498.98
NetJ2_S2_74: L6_S2.5 ZIF_S2.74 | length 1204.1
  Bottom Layer w5: L6_S2.5@-405,1675 -405,1640 -395,1630 -395,995 -365.5,965.5 -365.5,605.5 -337.2,577.2 ZIF_S2.74@-337.2,498.98
NetJ2_S2_76: L5_S2.5 ZIF_S2.76 | length 880.4
  Bottom Layer w5: L5_S2.5@-430,1350 -430,1310 -415,1295 -415,1000 -376,961 -376,591 -360,575 -360,499.8 ZIF_S2.76@-360.83,498.98
NetJ2_S2_78: L4_S2.5 ZIF_S2.78 | length 555.2
  Bottom Layer w5: L4_S2.5@-455,1025 -386,956 -386,585.86 -385,584.86 -385,499.53 ZIF_S2.78@-384.45,498.98
NetJ2_S2_80: L6_S2.6 ZIF_S2.80 | length 1216.2
  Bottom Layer w5: L6_S2.6@-505,1675 -505,1640 -495,1630 -495,1000 -408.07,913.07 ZIF_S2.80@-408.07,498.98
NetJ2_S2_82: L5_S2.6 ZIF_S2.82 | length 893.1
  Bottom Layer w5: L5_S2.6@-530,1350 -530,1310 -515,1295 -515,995 -430,910 -430,575 -431.69,573.31 ZIF_S2.82@-431.69,498.98
NetJ2_S2_84: L4_S2.6 ZIF_S2.84 | length 583.4
  Bottom Layer w5: L4_S2.6@-555,1025 -555,995 -545,985 -525,985 -450,910 -450,580 -455.31,574.69 ZIF_S2.84@-455.31,498.98
NetJ2_S2_86: L6_S2.7 ZIF_S2.86 | length 1266.1
  Bottom Layer w5: L6_S2.7@-605,1675 -605,1640 -595,1630 -595,990 -575,970 -530,970 -465,905 -465,590 -478.94,576.06 ZIF_S2.86@-478.94,498.98
NetJ2_S2_88: L5_S2.7 ZIF_S2.88 | length 960.6
  Bottom Layer w5: L5_S2.7@-630,1350 -630,1310 -615,1295 -615,970 -600,955 -535,955 -480,900 -480,595 -502.56,572.44 ZIF_S2.88@-502.56,498.98
NetJ2_S2_90: L4_S2.7 ZIF_S2.90 | length 663.8
  Bottom Layer w5: L4_S2.7@-655,1025 -655,955 -640,940 -540,940 -495,895 -495,605 -526.18,573.82 ZIF_S2.90@-526.18,498.98
NetL4_S1_8: L4_S1.8 R3.2@720,640 | length 436.6
  Top Layer w5: R3.2@725,635 760,635 775,650 775,735 785,745 785,939.14 770,954.14 L4_S1.8@770,1020
NetL4_S2_8: L4_S2.8 R3.2@-710,640 | length 436.6
  Bottom Layer w5: L4_S2.8@-755,1025 -755,959.14 -770,944.14 -770,750 -760,740 -760,655 -745,640 R3.2@-710,640
NetL5_S1_8: L5_S1.8 R2.2@720,760 | length 656.1
  Top Layer w5: R2.2@725,755 760,755 775,770 775,935 730,980 730,1290 745,1305 L5_S1.8@745,1345
NetL5_S2_8: L5_S2.8 R2.2@-710,760 | length 656.1
  Bottom Layer w5: L5_S2.8@-730,1350 -730,1310 -715,1295 -715,985 -760,940 -760,775 -745,760 R2.2@-710,760
NetL6_S1_8: L6_S1.8 R1.2@720,880 | length 826.6
  Top Layer w5: L6_S1.8@705,1655 720,1670 720,1635 710,1625 710,890 R1.2@725,875
NetL6_S2_8: L6_S2.8 R1.2@-710,880 | length 826.6
  Bottom Layer w5: R1.2@-710,880 -695,895 -695,1630 -705,1640 L6_S2.8@-705,1675 L6_S2.8@-690,1660
pads on no net: MDM.9 MDM.10 MDM.11 MDM.20 MDM.21 ZIF_S1.2@-600.55,215.51 ZIF_S2.2@615.55,215.51

## Polygon pours and split planes (outlines as drawn)
no net on Mechanical 1 "TopOverlay-No Net" (none): -820,3500 -820,-40 815,-40 815,3500 -820,3500
GND1 on Internal Plane 1 (split plane): 794.9,5.1 -799.9,5.1 -799.9,3479.9 794.9,3479.9
GND2 on Internal Plane 2 (split plane): 794.9,5.1 -799.9,5.1 -799.9,3479.9 794.9,3479.9